# EAGLE board pulse_module (EAGLE 9.2.2)
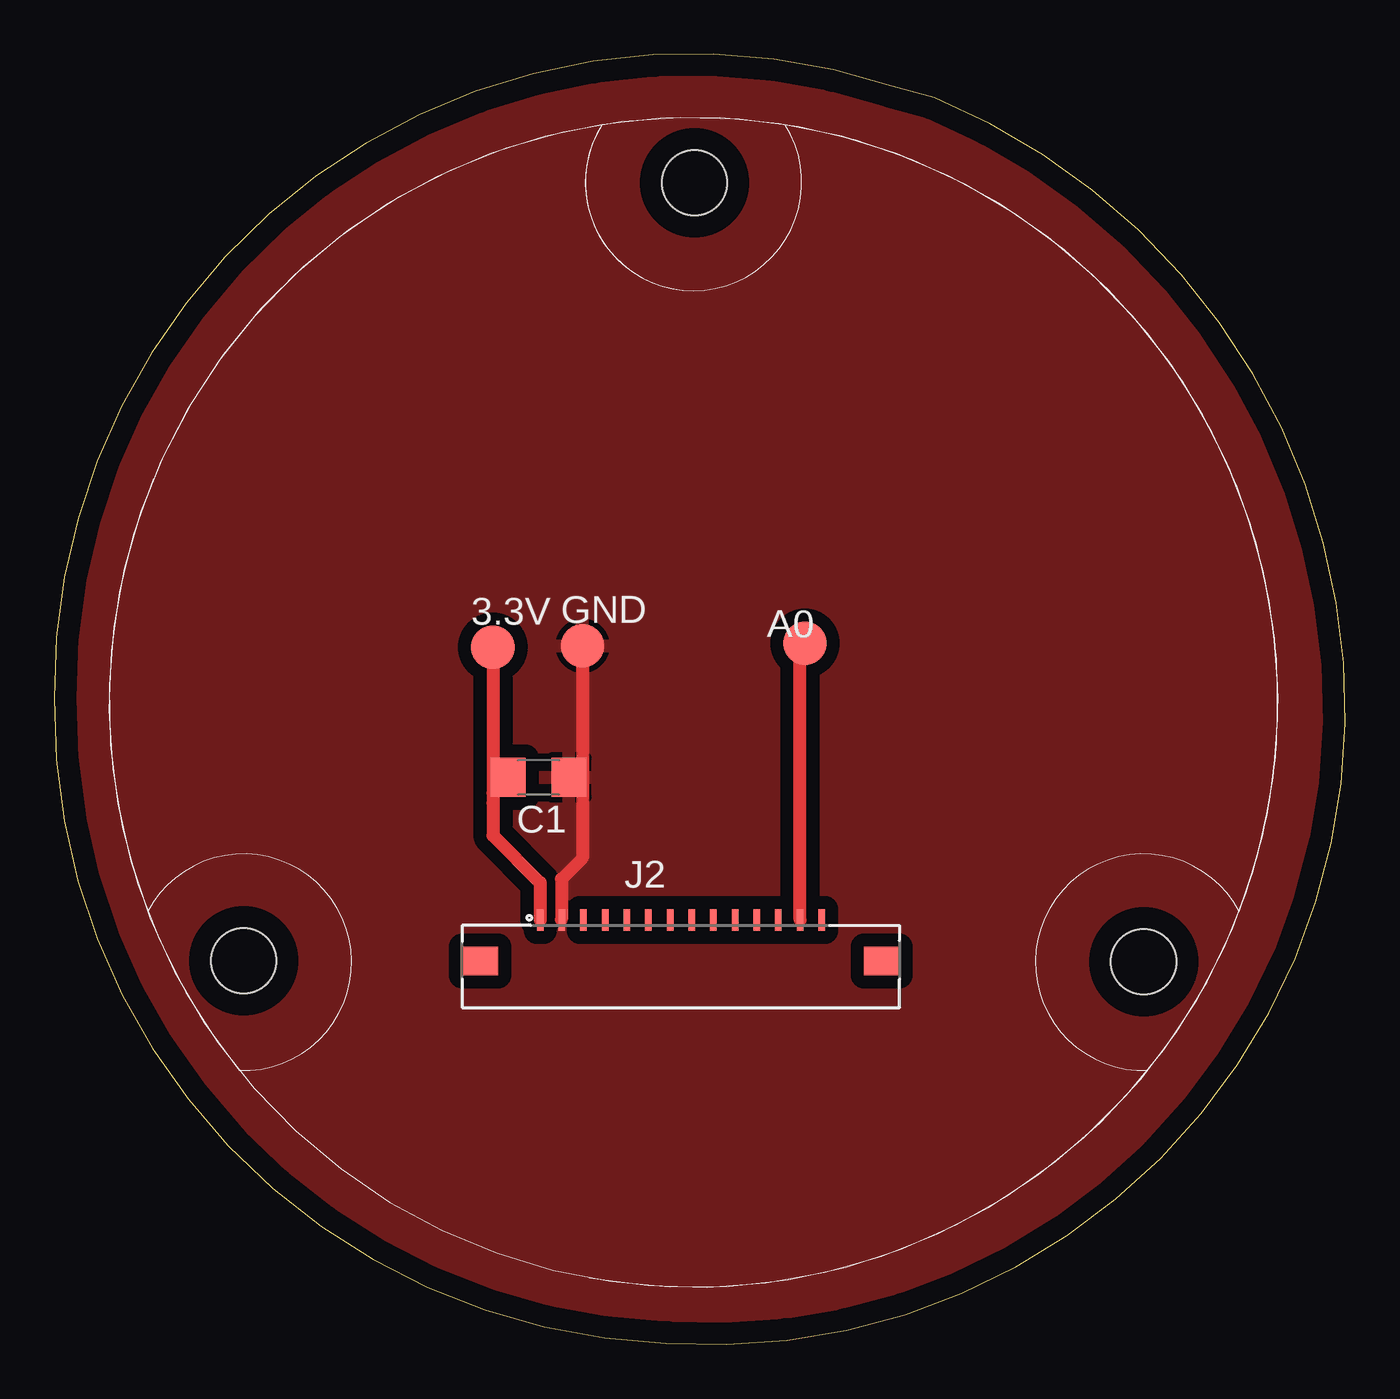
[diagram p0: board, top side]

Size 59.62 x 59.56 mm. Coordinates in mm from the lower left corner, seen from the top.
Outline: 40.65,57.54 38.69,58.09 arc109 0,29.84 arc89 28.25,0.07 arc104 59.2,34.24 arc58 40.65,57.54
Copper layers (1*16): Top 0.035mm / dielectric 1.5mm / Bottom 0.035mm
Design rules "default": minimum track width 6mil, minimum drill 0.35mm, track to track 6mil, track to pad 6mil, pad to pad 6mil, via to via 6mil, smd to smd 6mil, copper to edge 40mil, drill to drill 6mil, minimum pad ring 10mil, minimum via ring 8mil, stop-mask expansion 4mil, vias tented up to drill 0mil, thermal gap 10mil
Net classes: 0 default: width 0.254 mm, drill 0.508 mm, clearance 0.254 mm
Holes 3 mm at 29.57,53.62 50.31,17.67 8.75,17.72

## Footprints (pad centres in the part's own frame; a part is rotated, then mirrored left to right if it is on the bottom)
TP20R = smd 2 x 2: TP 0,0
C1206 = smd 1.6 x 1.8: 1 -1.4,0; 2 1.4,0
686114183522 = smd 0.3 x 1: 1 -6.5,1.9; 2 -5.5,1.9; 3 -4.5,1.9; 4 -3.5,1.9; 5 -2.5,1.9; 6 -1.5,1.9; 7 -0.5,1.9; 8 0.5,1.9; 9 1.5,1.9; 10 2.5,1.9; 11 3.5,1.9; 12 4.5,1.9; 13 5.5,1.9; 14 6.5,1.9 | smd 1.65 x 1.3: Z1 -9.275,0; Z2 9.275,0

## Placement (x,y rotation side)
3.3V  TPTP20R  [TP20R]  20.26,32.18 0 top
A0  TPTP20R  [TP20R]  34.66,32.36 0 top
C1  100nF  [C1206]  22.37,26.17 180 top
GND  TPTP20R  [TP20R]  24.39,32.26 0 top
J2  [686114183522]  28.94,17.7 0 top

## Library data of the parts
3.3V A0 GND = testpad
C1 = rcl; SPICEPREFIX: C
J2 = Wurth_Elektronik_Electromechanic_FPC_Connectors_&_Flat_Flexible_Cable_rev18c

## Nets
3.3V: 3.3V.TP C1.2 J2.1
A0: A0.TP J2.13
A1: J2.12
G1: J2.8
G2: J2.9
G3: J2.10
GND: C1.1 GND.TP J2.2
MISO: J2.7
MOSI: J2.6
SCK: J2.5
SCL: J2.3
SDA: J2.4
SS1: J2.11
VIN2: J2.14

## Tracks (layer width: path | path; a pad name or v marks a point on that pad's centre or on a via)
3.3V
  Top 0.254: 20.01,31.93 3.3V.TP
  Top 0.61: 3.3V.TP 20.26,25.46 | J2.1 22.44,21.32 20.26,23.5 20.26,24.99 20.26,25.46 | C1.2 20.26,25.46
A0
  Top 0.254: 34.44,32.14 A0.TP
  Top 0.61: J2.13 34.44,32.14
GND
  Top 0.254: 23.42,19.62 J2.2
  Top 0.61: GND.TP 24.39,26.01 | 24.39,26.01 24.39,22.45 23.42,21.48 23.42,19.62 | C1.1 23.93,26.01 24.39,26.01
  pour Top (isolate 0.61): -2.3,61.06 -2.3,0.36 -1.03,-0.91 65.01,-0.91 65.52,-0.41 65.52,62.84 64.5,63.86 56.63,63.86